# Allegro board XR871ET_REF_Simple_L4_V1_0-20170701.brd
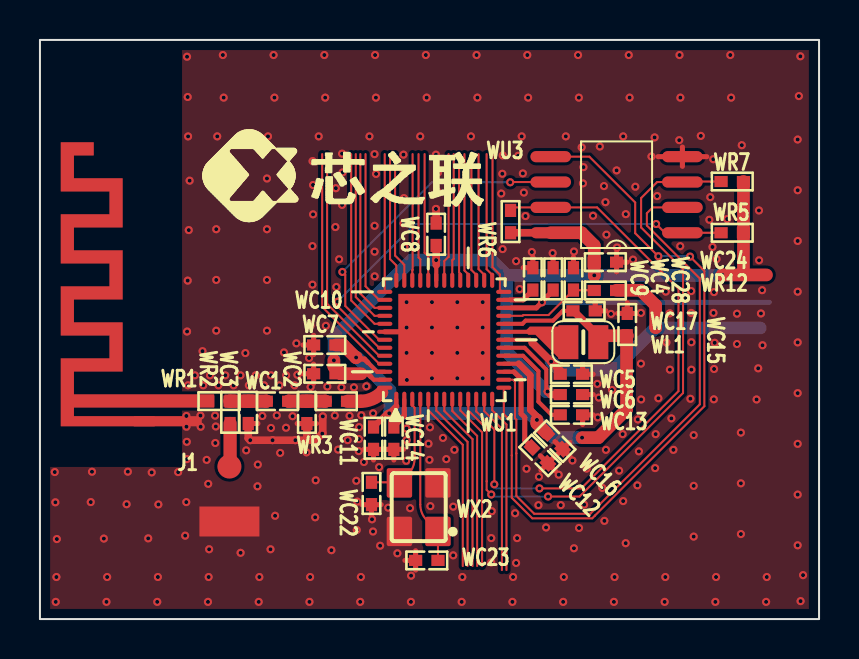
[diagram p0: board, top side]
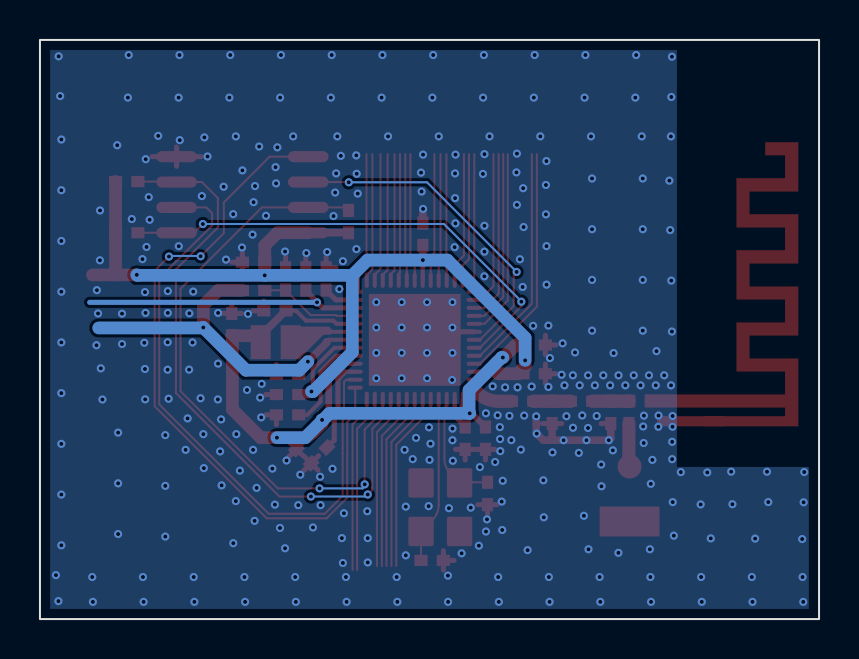
[diagram p1: board, bottom side, seen from below]

Outline 39 x 29 mm; copper layers: TOP, L2, L3, BOTTOM. Coordinates in mm from the lower left corner of the outline.
Outline path: rectangle 0,0 39,29

## Design rules (mm)
net group RF: nets ANT N16735516 N16735520

## Placement (name value [footprint] x y rotation side)
J1  ANT  [ANT2]  9.48 6.14 0 top
NOREF  -  []  4.14 22.07 0 top
NOREF#2  -  []  0 29 0 top
NOREF#3  -  []  0 29 0 top
NOREF#4  -  []  0 0 90 top
NOREF#5  -  []  0.51 7.62 90 top
NOREF#6  -  []  1.04 9.65 90 top
NOREF#7  -  []  0.51 7.62 90 top
WC1  0R  [C0402]  11.89 10.91 180 top
WC2  NC  [C0402]  13.36 10.35 90 top
WC3  NC  [C0402]  10.43 10.35 90 top
WC4  4.7uF  [C0402]  25.69 17.03 270 top
WC5  4.7uF  [C0402]  26.6 12.26 0 top
WC6  4.7uF  [C0402]  26.6 11.24 0 top
WC7  104  [C0402]  14.26 12.28 0 top
WC8  104  [C0402]  19.83 19.27 90 top
WC9  1uF  [C0402]  24.67 17.03 270 top
WC10  104  [C0402]  14.26 13.72 0 top
WC11  104  [C0402]  16.7 9.06 90 top
WC12  4.7uF  [C0402]  25.03 8.19 135 top
WC13  4.7uF  [C0402]  26.6 10.23 180 top
WC14  1uF  [C0402]  17.71 9.06 90 top
WC15  4.7uF  [C0402]  29.4 14.75 90 top
WC16  NC-104  [C0402]  25.77 8.91 135 top
WC17  NC-104  [C0402]  27.24 15.43 180 top
WC22  20pF  [C0402]  16.6 6.29 90 top
WC23  20pF  [C0402]  19.36 2.94 180 top
WC24  104  [C0402]  28.31 17.87 0 top
WC28  100pF  [C0402]  26.71 17.03 270 top
WL1  3.3uH-1.0A DCR<0.2R  [L0806]  27.2 13.86 0 top
WR1  0R  [R0402]  8.96 10.91 180 top
WR2  NC-0R  [R0402]  9.52 10.35 270 top
WR3  0R-NC  [R0402]  14.84 10.91 180 top
WR5  100K-NC  [R0402]  34.66 19.34 0 top
WR6  NC-100K  [R0402]  23.56 19.9 270 top
WR7  NC-100K  [R0402]  34.66 21.91 0 top
WR12  10K  [R0402]  28.31 16.45 0 top
WU1  XR871ET  [QFN52P0_4B6X6_NOSOCKET]  20.24 13.98 0 top
WU3  PN25F16BSSIUG  [SOIC-8]  28.86 21.25 180 top
WX2  24MHz-E3SB24E004304E  [CRY-TSX3225]  18.96 5.6 180 top

## Library data of the parts
J1 = ANT_0
WC1-WC9 WC12-WC15 WC23 WC24 = CAPACITOR
WC10 WC11 WC16 WC17 WC22 WC28 = CAPACITOR_0
WL1 = INDUCTOR
WR1-WR3 WR5-WR7 = R
WR12 = R1 0805
WU1 = XR871ET
WU3 = SPI-NOR-SO8
WX2 = Crystal4Pin_0

## Footprints (pads in the part's own frame, mm; a bottom-side part is the same pattern mirrored in y, then rotated)
ANT2
  round 1.2 smd: 1(0,1.5)
  rect 3x1.5 smd: 2(0,-1.25)
C0402
  rect 0.66x0.56 smd: 1(-0.56,0) 2(0.56,0)
CRY-TSX3225
  custom 1.27x1.47 smd: 1(-0.965,1.215) 2(-0.965,-1.215) 3(0.965,-1.215) 4(0.965,1.215)
L0806
  rect 1x1.7 smd: 1(0.75,0) 2(-0.75,0)
QFN52P0_4B6X6_NOSOCKET
  oval 0.203x0.762 smd: 1(-2.4,-2.981) 2(-2,-2.981) 3(-1.6,-2.981) 4(-1.2,-2.981) 5(-0.8,-2.981) 6(-0.4,-2.981) 7(0,-2.981) 8(0.4,-2.981) 9(0.8,-2.981) 10(1.2,-2.981) 11(1.6,-2.981) 12(2,-2.981) 13(2.4,-2.981) 27(2.4,2.981) 28(2,2.981) 29(1.6,2.981) 30(1.2,2.981) 31(0.8,2.981) 32(0.4,2.981) 33(0,2.981) 34(-0.4,2.981) 35(-0.8,2.981) 36(-1.2,2.981) 37(-1.6,2.981) 38(-2,2.981) 39(-2.4,2.981)
  oval 0.762x0.203 smd: 14(2.981,-2.4) 15(2.981,-2) 16(2.981,-1.6) 17(2.981,-1.2) 18(2.981,-0.8) 19(2.981,-0.4) 20(2.981,0) 21(2.981,0.4) 22(2.981,0.8) 23(2.981,1.2) 24(2.981,1.6) 25(2.981,2) 26(2.981,2.4) 40(-2.981,2.4) 41(-2.981,2) 42(-2.981,1.6) 43(-2.981,1.2) 44(-2.981,0.8) 45(-2.981,0.4) 46(-2.981,0) 47(-2.981,-0.4) 48(-2.981,-0.8) 49(-2.981,-1.2) 50(-2.981,-1.6) 51(-2.981,-2) 52(-2.981,-2.4)
  rect 4.597x4.597 smd: 53(0,0)
R0402
  rect 0.66x0.56 smd: 1(-0.56,0) 2(0.56,0)
SOIC-8
  oval 2.032x0.559 smd: 1(-3.296,1.905) 2(-3.296,0.635) 3(-3.296,-0.635) 4(-3.296,-1.905) 5(3.296,-1.905) 6(3.296,-0.635) 7(3.296,0.635) 8(3.296,1.905)

## Nets
GND: J1.2 WC2.1 WC3.1 WC4.1 WC5.2 WC6.2 WC7.1 WC8.2 WC9.1 WC10.1 WC11.1 WC12.1 WC13.1 WC14.1 WC15.2 WC16.1 WC17.1 WC22.1 WC23.2 WC24.2 WC28.1 WU1.45(TEST) WU1.53(EPAD) WU3.4(VSS) WX2.2 WX2.4(5)
VCC-BAT: WC5.1 WR12.2 WU1.20(VCC)
VDD25-EF: WC4.2 WU1.24(VDD25_EF)
VDD-3V3: WC6.1 WC7.2 WC8.1 WC24.1 WR5.2 WR6.2 WR7.2 WU1.19(VDD_3V3) WU1.34(VDD_IO) WU1.51(VDD33_PA) WU3.8(VCC)
ANT: WC1.1 WC2.2 WR3.2
CHIP-PWD: WC28.2 WR12.1 WU1.23(CHIP_PWD)
HXTAL1: WC23.1 WU1.4(HXTAL1) WX2.1
HXTAL2: WC22.2 WU1.3(HXTAL2) WX2.3
PA0: WU1.5(PA0/SPI1_MOSI/SD_CMD/UART0_TX/C)
PA1: WU1.6(PA1/SPI1_MISO/SD_DATA0/UART0_RX)
PA2: WU1.13(PA2/SPI1_CLK/SD_CLK/TWI1_SCL/CS)
PA3: WU1.12(PA3/SPI1_CS0/SD_DATA1/TWI1_SDA/)
PA4: WU1.35(PA4/WUPIO0/UART1_CTS/SD_DATA2/T)
PA5: WU1.36(PA5/WUPIO1/UART1_RTS/SD_DATA3/T)
PA6: WU1.37(PA6/WUPIO2/UART1_TX/SPI1_CS1/TW)
PA7: WU1.38(PA7/WUPIO3/UART1_RX/SPI1_CS2/TW)
PA8: WU1.26(PA8/ADC_CH0/PWM0/TWI1_SCL/CSI_P)
PA9: WU1.27(PA9/ADC_CH1/PWM1/TWI1_SDA/CSI_M)
PA10: WU1.28(PA10/ADC_CH2/PWM2/DMIC_CLK/CSI_)
PA11: WU1.29(PA11/ADC_CH3/PWM3/DMIC_DATA/CSI)
PA12: WU1.30(PA12/ADC_CH4/PWM4/I2S_MCLK/IR_T)
PA13: WU1.31(PA13/ADC_CH5/PWM5/I2S_BCLK/32KO)
PA14: WU1.32(PA14/ADC_CH6/PWM6/I2S_DI/IR_RX/)
PA15: WU1.33(PA15/ADC_CH7/PWM7/I2S_DO/UART1_)
PA16: WU1.9(PA16/IR_TX/IR_RX/I2S_LRCLK/UART)
PA17: WU1.39(PA17/WUPIO4/TWI0_SCL/IR_RX/TWI1)
PA18: WU1.40(PA18/WUPIO5/TWI0_SDA/IR_TX/TWI1)
PA19: WU1.41(PA19/WUPIO6/NUART_CTS/NSWD_TMS/)
PA20: WU1.42(PA20/WUPIO7/NUART_RTS/NSWD_TCK/)
PA21: WU1.43(PA21/WUPIO8/NUART_TX/DMIC_CLK/P)
PA22: WU1.44(PA22/WUPIO9/NUART_RX/DMIC_DATA/)
PB13: WU1.7(PB13)
PB15: WU1.8(PB15)
PCBANT: WR1.2
SPI0-CLK: WU1.46(PB7/SPI0_CLK/SD_CLK/FLASH_CLK/E) WU3.6(CLK)
SPI0-CS: WR5.1 WU1.47(PB6/SPI0_CS0/FLASH_CS/EINTB6) WU3.1(CS#)
SPI0-HOLD: WR6.1 WU1.11(PB3/SWD_TCK/JTAG_TDI/PWM7/FLASH) WU3.7(HOLD#)
SPI0-MISO: WU1.15(PB5/SPI0_MISO/SD_DATA0/FLASH_MI) WU3.2(MISO)
SPI0-MOSI: WU1.14(PB4/SPI0_MOSI/SD_CMD/FLASH_MOSI) WU3.5(MOSI)
SPI0-WP: WR7.1 WU1.10(PB2/SWD_TMS/JTAG_TDO/PWM6/FLASH) WU3.3(WP#)
UART0-RX: WU1.48(PB1/UART0_RX/JTAG_TCK/PWM5/SWD_)
UART0-TX: WU1.49(PB0/UART0_TX/JTAG_TMS/PWM4/SWD_)
N16732104: WC10.2 WC11.2 WC15.1 WC16.2 WC17.2 WL1.1 WU1.1(VDD14_RX) WU1.17(VDD14_DIG) WU1.22(VDD_SENSE) WU1.50(VDD14_TX)
N16732180: WR3.1 WU1.52(ANT)
N16732230: WL1.2 WU1.21(VDD_VLX)
N16732278: WC14.2 WU1.2(VDD12_CLK)
N16732320: WC13.2 WU1.18(VDD12_DIG)
N16732574: WC12.2 WU1.16(VDD12_SRAM)
N16732608: WC9.2 WU1.25(VDD_RTC)
N16735516: J1.1 WR2.2
N16735520: WC1.2 WC3.2 WR1.1 WR2.1

## Via types
v1: diameter 0.406, hole 0.203, TOP to BOTTOM, 368 vias

## Routing (per net, layer and track width the routed paths; a pad name or vN(x,y) marks a point on that pad's centre or on a via; arc(x,y) is an arc through that point)
GND: length 37.1
  TOP w0.254: WC12.1 25.8,7.42 ; WC12.1 25.08,7.46 ; WC12.1 25.77,8.14 ; WC12.1 25.05,8.18 ; WC14.1 WC11.1 ; WC14.1 18.2,8.5 ; WC14.1 17.71,7.96 ; WC11.1 16.21,8.5 ; WC11.1 16.7,7.96 ; 13.7,11.8 WC7.1 ; WC7.1 13.17,12.28 ; WC7.1 13.7,12.77 ; WC24.2 28.87,18.36 ; WC24.2 29.4,17.87 ; WC24.2 28.87,17.39 ; 16.11,5.73 WC22.1 ; WC22.1 17.08,5.73 ; WC22.1 16.6,5.2 ; WU1.53 19.84,14.38 WU1.45 ; 25.78,8.89 WC16.1 ; WC16.1 26.54,8.13 ; WC16.1 26.5,8.85 ; WC16.1 25.82,8.17 ; WC6.2 27.7,11.24 ; WC3.1 10.91,9.79 ; 24.19,17.59 WC9.1 24.67,18.13 ; WU3.4 32.16,23.64 ; WU3.4 33.38,23.15 ; WU3.4 30.94,23.15 ; WU3.4 32.16,22.67 ; 28.91,15.31 WC15.2 ; WC15.2 29.4,15.84 ; WC15.2 29.88,15.31 ; 27.16,12.74 WC5.2 27.7,12.26 ; 18.8,2.45 WC23.2 ; WC23.2 18.27,2.94 ; WC23.2 18.8,3.42 ; 27.7,10.23 WC13.1 27.16,9.74 ; 28.33,15.43 WC17.1 27.8,15.92 ; WC28.1 26.71,18.13 ; 12.88,9.79 WC2.1 13.85,9.79 ; 13.17,13.72 WC10.1 ; WC10.1 13.7,13.24 ; WC10.1 13.7,14.21 ; WC4.1 25.69,18.13
  TOP w0.381: 13.5,8.96 13.4,9.05 13.36,9.05 ; 13.5,8.96 13.27,8.96 ; 13.5,8.96 13.8,8.96 v1(14.13,9.29) 14.16,9.31 v1(14.16,10.15) ; 19.83,20.55 v1(19.82,20.54) 19.83,20.53 WC8.2 ; WC3.1 10.43,9.06 v1(10.53,8.96) v1(11.64,8.96) v1(12.79,8.96) 13.27,8.96 ; 13.27,8.96 13.36,9.05 ; 13.36,9.05 WC2.1
  vias: v1(0.74,7.36) v1(0.77,5.85) v1(0.85,4.01) v1(0.82,2.11) v1(0.79,0.86) v1(2.54,5.86) v1(2.6,7.38) v1(3.2,4.03) v1(3.33,0.86) v1(3.36,2.11) v1(4.34,5.75) v1(4.4,7.38) v1(5.42,4.04) v1(5.6,7.34) v1(5.93,5.74) v1(5.9,2.11) v1(5.87,0.86) v1(6.92,7.36) v1(7.33,10.17) v1(7.33,9.63) v1(7.32,5.86) v1(7.27,4.18) v1(7.36,28.16) v1(7.39,26.14) v1(7.42,24.17) v1(7.4,16.95) v1(7.36,14.4) v1(7.41,11.7) v1(7.35,8.88) v1(7.35,8.01) v1(7.49,21.95) v1(7.45,19.48) v1(7.75,12.21) v1(8.04,10.19) v1(8.05,9.63) v1(8.14,13.42) v1(8.17,11.7) v1(8.34,7.97) v1(8.42,6.77) v1(8.44,2.11) v1(8.41,0.86) v1(8.51,12.21) v1(8.47,3.5) v1(8.82,22.06) v1(8.82,19.52) v1(8.82,16.98) v1(8.82,14.44) v1(8.77,10.19) v1(8.8,9.64) v1(8.78,8.82) v1(8.87,24.17) v1(8.93,11.7) v1(9.16,28.24) v1(9.2,26.11) v1(9.28,12.21) v1(9.7,11.7) v1(10.04,12.21) v1(10.04,3.32) v1(10.28,13.32) v1(10.32,8.45) v1(10.46,11.7) v1(10.8,12.21) v1(10.91,7.74) v1(10.89,6.65) v1(10.98,2.11) v1(10.95,0.86) v1(11.13,10.17) v1(11.22,11.7) v1(11.41,24.17) v1(11.36,22.06) v1(11.36,19.52) v1(11.36,16.98) v1(11.36,14.44) v1(11.54,3.5) v1(11.56,12.21) v1(11.56,9.57) v1(11.7,28.24) v1(11.74,26.11) v1(11.77,5.17) v1(11.86,10.2) v1(11.98,11.7) v1(12.02,8.32) v1(12.22,13.35) v1(12.32,12.21) v1(12.32,9.58) v1(12.65,10.16) v1(12.74,11.7) v1(12.84,13.81) v1(12.89,12.23) v1(13.35,8.35) v1(13.55,14.7) v1(13.47,13.07) v1(13.55,11.62) v1(13.52,2.11) v1(13.49,0.86) v1(13.65,22.93) v1(13.64,18.68) v1(13.64,16.75) v1(13.67,21.74) v1(13.67,20.27) v1(13.8,6.95) v1(13.78,5.1) v1(13.95,24.17) v1(14.24,28.24) v1(14.28,26.11) v1(14.31,14.68) v1(14.39,11.64) v1(14.59,3.45) v1(14.81,21.58) v1(14.79,19.63) v1(14.84,16.63) v1(14.76,10.19) v1(14.93,8.48) v1(14.97,18.02) v1(15.12,23.31) v1(15.15,22.37) v1(15.12,20.74) v1(15.09,11.6) v1(15.4,8.96) v1(15.5,10.18) v1(15.72,11.6) v1(15.83,6.92) v1(15.89,5.88) v1(15.86,4.46) v1(15.98,9.61) v1(15.97,9.01) v1(15.96,8.41) v1(16.03,0.86) v1(16.09,10.2) v1(16.06,2.11) v1(16.22,7.86) v1(16.34,11.66) v1(16.49,24.17) v1(16.62,4.99) v1(16.75,23.28) v1(16.68,10.3) v1(16.67,4.38) v1(16.78,28.24) v1(16.82,26.11) v1(16.82,22.29) v1(16.75,19.69) v1(16.75,18.4) v1(16.76,17.16) v1(16.98,7.61) v1(17.03,3.67) v1(17.43,5.58) v1(17.89,3.29) v1(18.2,23.26) v1(18.22,22.32) v1(18.22,21.08) v1(18.2,19.82) v1(18.24,18.62) v1(18.35,9.54) v1(18.33,7.93) v1(18.35,15.87) v1(18.35,14.6) v1(18.35,13.33) v1(18.37,11.97) v1(18.35,8.96) v1(18.53,5.55) v1(18.58,2.17) v1(18.57,0.86) v1(19.03,24.17) v1(19.32,28.24) v1(19.36,26.11) v1(19.52,9.6) v1(19.45,8.78) v1(19.5,7.97) v1(19.54,5.65) v1(19.62,15.87) v1(19.62,14.6) v1(19.62,13.33) v1(19.62,12.06) v1(19.82,23.26) v1(19.92,22.36) v1(19.9,21.41) v1(20.17,9.07) v1(20.34,8.01) v1(20.75,8.47) v1(20.69,5.63) v1(20.69,3.19) v1(20.89,15.87) v1(20.89,14.6) v1(20.89,13.33) v1(20.89,12.06) v1(21.14,2.11) v1(21.11,0.86) v1(21.57,24.17) v1(21.86,28.24) v1(21.9,26.11) v1(22.16,15.87) v1(22.16,14.6) v1(22.16,13.33) v1(22.16,12.06) v1(22.62,5.4) v1(22.59,4.05) v1(22.59,2.83) v1(23.15,22.3) v1(23.09,21.31) v1(23.17,23.22) v1(23.16,18.53) v1(23.68,2.11) v1(23.65,0.86) v1(23.84,17.92) v1(23.78,5.3) v1(23.84,2.81) v1(23.94,23.2) v1(23.89,4.05) v1(24.01,16.53) v1(24.11,24.17) v1(24.17,22.32) v1(24.22,21.36) v1(24.3,20.18) v1(24.4,28.24) v1(24.44,26.11) v1(24.36,7.53) v1(24.62,18.38) v1(24.98,7.13) v1(24.95,5.7) v1(25.33,4.59) v1(25.66,18.33) v1(25.97,7.23) v1(26.07,5.7) v1(26.22,2.11) v1(26.19,0.86) v1(26.32,24.17) v1(26.73,18.4) v1(26.65,7.94) v1(26.73,3.55) v1(26.94,28.24) v1(26.98,26.11) v1(26.98,4.56) v1(27.12,23.62) v1(27.21,22.63) v1(27.18,21.82) v1(27.24,5.73) v1(27.37,7.53) v1(27.68,20.19) v1(27.9,11.78) v1(27.92,10.1) v1(28.03,23.66) v1(27.98,11.09) v1(28.23,21.68) v1(28.15,6.57) v1(28.31,20.88) v1(28.33,8.47) v1(28.25,4.92) v1(28.36,19.25) v1(28.59,15.28) v1(28.64,11.47) v1(28.73,0.86) v1(28.76,2.11) v1(28.87,22.47) v1(28.89,18.61) v1(28.99,7.43) v1(29.19,24.17) v1(29.17,9.26) v1(29.19,5.91) v1(29.33,20.28) v1(29.32,3.8) v1(29.48,28.24) v1(29.52,26.11) v1(29.69,18) v1(29.8,21.65) v1(29.93,10) v1(29.91,6.7) v1(29.98,8.4) v1(30.08,15.33) v1(30.08,12.79) v1(30.09,11) v1(30.61,23.16) v1(30.77,24.12) v1(30.82,9.26) v1(30.79,7.56) v1(30.89,21.18) v1(30.96,11.06) v1(31.33,16.4) v1(31.3,2.11) v1(31.27,0.86) v1(31.36,13.85) v1(31.52,15.31) v1(31.53,12.49) v1(31.61,10.05) v1(31.71,8.47) v1(32.02,28.24) v1(32,23.98) v1(32.06,26.11) v1(32.05,18.67) v1(32.6,16.42) v1(32.6,15.33) v1(32.61,13.86) v1(32.61,12.49) v1(32.56,11.03) v1(32.73,9.21) v1(32.73,6.67) v1(32.73,4.13) v1(33.08,24.2) v1(33.51,20) v1(33.55,21.13) v1(33.71,23.03) v1(33.67,18.63) v1(33.74,16.37) v1(33.72,15.33) v1(33.74,12.52) v1(33.73,11) v1(33.78,13.83) v1(33.84,2.11) v1(33.81,0.86) v1(33.87,18.02) v1(34.4,20.03) v1(34.56,28.24) v1(34.6,26.11) v1(34.89,15.29) v1(34.89,13.77) v1(35.13,23.73) v1(35.09,9.34) v1(35.09,6.8) v1(35.09,4.26) v1(35.87,11) v1(35.99,20.46) v1(36,17.97) v1(35.95,12.56) v1(36.15,16.47) v1(36.09,15.3) v1(36.17,13.71) v1(36.38,2.11) v1(36.35,0.86) v1(37.93,24.01) v1(37.93,21.47) v1(37.93,18.93) v1(37.93,16.39) v1(37.93,13.85) v1(37.93,11.31) v1(37.93,8.77) v1(37.93,6.23) v1(37.93,3.69) v1(37.99,26.19) v1(38.06,28.18) v1(38.08,0.9) v1(38.2,2.2)
VCC-BAT: length 18.6
  TOP w0.102: 28.87,16.47 WR12.2
  TOP w0.203: 24.65,13.88 24.55,13.98 WU1.20
  TOP w0.381: 24.65,13.88 24.65,13.83 v1(25.59,12.89) 26.04,12.44 WC5.1
  TOP w0.635: 28.87,16.47 30.07,16.47 30.82,15.71 30.82,14.6 v1(30.82,14.6)
  BOTTOM w0.635: v1(25.59,12.89) 26.02,12.46 28.69,12.46 v1(30.82,14.6) 30.84,14.58 36.06,14.58
VDD25-EF: length 14.2
  TOP w0.203: WU1.24 23.61,15.58
  TOP w0.254: WC4.2 25.65,16.41 25.13,15.9 v1(25.13,15.86) 25.13,15.86 24.85,15.58 23.61,15.58
  BOTTOM w0.254: v1(25.13,15.86) 36.51,15.86
VDD-3V3: length 51.6
  TOP w0.127: WC7.2 14.84,12.31 15.05,12.31
  TOP w0.203: v1(25.41,11.39) 25.35,11.46 25.35,12.5 24.26,13.58 WU1.19 ; WU1.51 16.71,11.98 16.58,12.12 ; WU1.34 19.84,17.74
  TOP w0.254: 16.58,12.12 16.42,12.28 16.08,12.28
  TOP w0.381: WC8.1 v1(19.83,17.98) 19.84,17.97 19.84,17.74 ; WR6.2 23.56,19.34 WU3.8 ; v1(25.41,11.39) 25.56,11.24 WC6.1
  TOP w0.635: 35.25,17.23 36.37,17.23 ; 35.25,17.23 35.22,17.27 WR5.2 WR7.2 ; 35.25,17.23 34.16,17.23 v1(34.15,17.24) ; v1(14.71,12.95) 14.71,12.64 15.07,12.28 16.08,12.28 ; v1(27.75,17.21) WC24.1 27.75,18.71 27.11,19.34 WU3.8
  BOTTOM w0.635: 23.36,17.21 22.6,17.98 v1(19.83,17.98) 18.61,17.98 14.71,14.08 v1(14.71,12.95) ; 23.36,17.21 23.36,13.36 25.33,11.39 v1(25.41,11.39) ; 23.36,17.21 v1(27.75,17.21) 34.13,17.21 v1(34.15,17.24)
ANT: length 1.8
  TOP w0.66: WR3.2 14.27,10.91 WC2.2 12.45,10.91 WC1.1
CHIP-PWD: length 5.1
  TOP w0.102: WU1.23 24.16,15.18 24.2,15.22 25.46,15.22 WC28.2 26.71,16.47 27.75,16.47 WR12.1
HXTAL1: length 8.4
  TOP w0.102: WC23.1 19.92,2.94 WX2.1 19.36,4.95 arc(19.12,5.31) 19.04,5.73 WU1.4
HXTAL2: length 5.9
  TOP w0.102: WU1.3 18.64,10.7 18.76,10.58 18.76,8.04 arc(18.67,7.62) 18.43,7.25 WX2.3 17.96,6.85 WC22.2
PA0: length 9.1
  TOP w0.102: WU1.5 19.44,10.45 21.17,8.73 21.17,2.66
PA1: length 9
  TOP w0.102: WU1.6 19.84,10.44 21.41,8.87 21.41,2.66
PA2: length 8.8
  TOP w0.102: 23.35,2.45 23.35,9.74 22.64,10.46 WU1.13
PA3: length 8.9
  TOP w0.102: WU1.12 22.24,10.41 23.12,9.53 23.12,2.45
PA4: length 6.4
  TOP w0.102: WU1.35 19.44,18.16 19.26,18.34 19.26,23.28
PA5: length 6.4
  TOP w0.102: 18.95,23.28 18.95,18.11 19.04,18.02 WU1.36
PA6: length 6.3
  TOP w0.102: 18.65,23.28 18.65,17.49 18.64,17.47 WU1.37
PA7: length 6.5
  TOP w0.102: 17.78,23.28 17.78,18.2 18.24,17.74 WU1.38
PA8: length 7.2
  TOP w0.102: WU1.26 23.13,16.38 23.02,16.49 23.02,17.25 22.65,17.62 22.65,23.28
PA9: length 6.4
  TOP w0.102: 22.36,23.28 22.36,17.52 22.64,17.24 WU1.27
PA10: length 6.4
  TOP w0.102: 21.96,23.28 21.96,17.52 22.24,17.24 WU1.28
PA11: length 6.4
  TOP w0.102: 21.6,23.28 21.6,17.48 21.84,17.24 WU1.29
PA12: length 6.4
  TOP w0.102: 21.25,23.28 21.25,17.46 21.44,17.27 WU1.30
PA13: length 6.3
  TOP w0.102: 20.98,23.28 20.98,17.36 21.04,17.3 WU1.31
PA14: length 6.3
  TOP w0.102: WU1.32 20.64,17.96 20.71,18.03 20.71,23.28
PA15: length 6.4
  TOP w0.102: 20.46,23.28 20.46,18.14 20.24,17.92 WU1.33
PA16: length 8.8
  TOP w0.102: WU1.9 21.04,10.45 22.13,9.36 22.13,2.66
PA17: length 6.4
  TOP w0.102: WU1.39 17.84,17.71 17.52,18.03 17.52,23.28
PA18: length 6.9
  TOP w0.102: WU1.40 17.26,23.28
PA19: length 7.9
  TOP w0.102: 16.3,23.28 16.3,16.67 16.98,15.98 WU1.41
PA20: length 8.5
  TOP w0.102: 16.04,23.28 16.04,16.3 16.75,15.58 WU1.42
PA21: length 9
  TOP w0.102: 15.81,23.28 15.81,16.13 16.75,15.18 WU1.43
PA22: length 9.5
  TOP w0.102: WU1.44 16.75,14.78 15.58,15.95 15.58,23.28
PB13: length 8.9
  TOP w0.102: 21.65,2.66 21.65,9.01 20.24,10.42 WU1.7
PB15: length 8.9
  TOP w0.102: WU1.8 20.64,10.42 21.88,9.17 21.88,2.66
SPI0-CLK: length 16.7
  TOP w0.102: WU3.6 23.55,21.88 v1(23.54,21.87) ; WU1.46 16.98,13.98 15.28,15.68 15.28,17.24 v1(15.14,17.38)
  BOTTOM w0.102: v1(15.14,17.38) 15.19,17.43 15.19,17.44 19.62,21.87 v1(23.54,21.87)
SPI0-CS: length 24.4
  TOP w0.102: v1(30.84,19.78) 31.28,19.34 WU3.1 WR5.1 ; WU1.47 16.98,13.58 14.9,15.66 v1(14.9,15.89)
  BOTTOM w0.102: v1(30.84,19.78) 18.77,19.78 14.9,15.91 v1(14.9,15.89)
SPI0-HOLD: length 31.3
  TOP w0.102: v1(25,6.54) 27.09,6.54 31.96,11.41 31.96,16.54 27.89,20.61 WU3.7 23.71,20.61 WR6.1 ; WU1.11 21.84,10.4 22.75,9.49 22.75,6.75 v1(22.74,6.75)
  BOTTOM w0.102: v1(22.74,6.75) 22.74,6.64 22.84,6.54 v1(25,6.54)
SPI0-MISO: length 30.7
  TOP w0.102: WU1.15 23.68,11.98 23.78,11.88 23.78,10.05 23.85,9.99 23.85,8.29 23.85,6.17 24.74,5.27 27.55,5.27 33.03,10.75 33.03,17.06 30.38,19.71 30.38,20.32 30.67,20.61 WU3.2
SPI0-MOSI: length 35.8
  TOP w0.102: v1(30.96,18.17) 30.95,18.17 29.8,19.32 29.8,20.86 27.5,23.15 WU3.5 ; WU1.14 23.22,10.26 23.62,9.86 23.62,8.2 23.62,8.2 23.62,6.07 24.65,5.04 27.65,5.04 27.78,5.18 33.26,10.66 33.26,17.44 v1(32.54,18.15)
  BOTTOM w0.102: v1(32.54,18.15) 32.51,18.18 30.97,18.18 v1(30.96,18.17)
SPI0-WP: length 32
  TOP w0.102: v1(25.44,6.14) 27.01,6.14 32.19,11.32 32.19,17.51 30.09,19.61 30.09,21.08 30.9,21.88 WU3.3 32.19,21.91 WR7.1 ; v1(22.59,6.24) 22.36,6.47 22.36,6.9 22.36,9.53 21.44,10.45 WU1.10
  BOTTOM w0.102: v1(22.59,6.24) 22.69,6.14 v1(25.44,6.14)
UART0-RX: length 11.5
  TOP w0.102: WU1.48 16.98,13.18 14.37,15.79 14.37,23.28
UART0-TX: length 12
  TOP w0.102: WU1.49 16.98,12.78 14.13,15.64 14.13,23.28
N16732104: length 37.4
  TOP w0.203: WC17.2 26.17,15.43 25.68,14.94 24.31,14.94 24.15,14.78 WU1.22 ; 17.84,10.66 WU1.1 ; WU1.50 16.88,12.38 16.42,12.84 ; 23.97,12.78 WU1.17
  TOP w0.254: 15.83,13.1 15.91,13.02 16.24,13.02 16.42,12.84
  TOP w0.305: 17.84,10.66 v1(17.49,10.3) 17.38,10.3 WC11.2
  TOP w0.33: v1(24.88,9.97) 24.88,10.15 24.55,10.48 24.55,12.21 23.97,12.78
  TOP w0.381: WC17.2 26.71,15.43 27.95,14.19 WL1.1
  TOP w0.635: WC16.2 24.88,9.79 v1(24.88,9.97) ; 15.83,13.1 v1(15.83,13.1) 15.81,13.1 15.18,13.72 WC10.2 ; WL1.1 28.27,14.19 WC15.1 29.36,14.15 29.36,10.5 27.95,9.08 v1(27.14,9.08)
  BOTTOM w0.635: v1(15.83,13.1) 15.88,13.1 17.52,11.46 17.52,10.3 ; 17.52,10.3 24.5,10.3 24.88,9.92 ; 17.52,10.3 v1(17.49,10.3) ; v1(24.88,9.97) 24.88,9.97 24.88,9.92 ; 24.88,9.92 25.72,9.08 v1(27.14,9.08)
N16732180: length 2.1
  TOP w0.127: 17.1,11.34 17.2,11.44 arc(17.24,11.5) WU1.52
  TOP w0.66: WR3.1 16.05,10.91 arc(16.62,11.02) 17.1,11.34
N16732230: length 1.9
  TOP w0.203: WU1.21 25.08,14.38
N16732278: length 1.6
  TOP w0.203: 18.24,10.57 WU1.2
  TOP w0.254: WC14.2 18.24,10.19 18.24,10.57
N16732320: length 4.9
  TOP w0.203: WU1.18 24.18,13.18 24.95,12.41 24.95,10.89 25.61,10.23 WC13.2
N16732574: length 4.7
  TOP w0.203: 23.73,12.38 WU1.16
  TOP w0.254: 23.73,12.38 24.03,12.08 24.03,12.07 24.08,12.01 24.08,10.28 24.27,10.1 24.27,8.96 WC12.2
N16732608: length 1.7
  TOP w0.203: 23.58,15.98 WU1.25
  TOP w0.254: 23.58,15.98 24.18,15.98 WC9.2
N16735516: length 2.2
  TOP w0.66: WR2.2 9.52,7.67 J1.1
N16735520: length 1.8
  TOP w0.66: WC1.2 11.33,10.91 WC3.2 9.52,10.91 WR2.1

## Copper pours and planes (outline as drawn; the poured copper is in the pictures)
GND on TOP (solid shape): 8.1,9.65 4.69,9.65 4.69,10.16 8.1,10.16
GND on TOP, BOTTOM, L2, L3: 0.51,0.51 0.51,28.49 38.49,28.49 38.49,0.51
PCBANT on TOP (solid shape): 2.69,23.22 1.7,23.22 1.7,22.07 4.14,22.07 4.14,19.61 1.7,19.61 1.7,18.47 4.14,18.47 4.14,16 1.7,16 1.7,14.86 4.14,14.86 4.14,12.4 1.7,12.4 1.7,11.25 8.72,11.25 8.72,10.59 1.7,10.59 1.7,10.16 5.75,10.16 5.75,9.65 1.04,9.65 1.04,13.06 3.48,13.06 3.48,14.2 1.04,14.2 1.04,16.66 3.48,16.66 3.48,17.81 1.04,17.81 1.04,20.27 3.48,20.27 3.48,21.41 1.04,21.41 1.04,23.88 2.69,23.88
N16732230 on TOP (solid shape): 26.88,13.1 26.83,13.05 25.99,13.05 24.8,14.24 24.44,14.24 24.32,14.37 24.32,14.44 24.52,14.65 26.88,14.65

## Text on the board
PLACE_BOUND_TOP: FIGURE | SIZE | 8.0 | DRILL CHART: TOP to BOTTOM | ALL UNITS ARE IN MILS | PLATED | QTY | 388
